# EAGLE board Backplane (EAGLE 5.06)

Size 227.7 x 113.8 mm. Coordinates in mm from the lower left corner, seen from the top.
Outline: 0,0 113.8,113.8 227.7,0 0,0
Copper layers (1*16): Top 0.035mm / dielectric 1.5mm / Bottom 0.035mm
Design rules "default": minimum track width 10mil, minimum drill 24mil, track to track 8mil, track to pad 8mil, pad to pad 8mil, via to via 8mil, smd to smd 8mil, copper to edge 40mil, drill to drill 8mil, minimum pad ring 10mil, minimum via ring 8mil, stop-mask expansion 4mil, vias tented up to drill 0mil, thermal gap 10mil

## Footprints (pad centres in the part's own frame; a part is rotated, then mirrored left to right if it is on the bottom)
50PIN-IDC = drill 0.9 pad 1.27 round: 1 -22.73,-1; 2 -22.73,1; 3 -20.73,-1; 4 -20.73,1; 5 -18.73,-1; 6 -18.73,1; 7 -16.73,-1; 8 -16.73,1; 9 -14.73,-1; 10 -14.73,1; 11 -12.73,-1; 12 -12.73,1; 13 -10.73,-1; 14 -10.73,1; 15 -8.73,-1; 16 -8.73,1; 17 -6.73,-1; 18 -6.73,1; 19 -4.73,-1; 20 -4.73,1; 21 -2.73,-1; 22 -2.73,1; 23 -0.73,-1; 24 -0.73,1; 25 1.27,-1; 26 1.27,1; 27 3.27,-1; 28 3.27,1; 29 5.27,-1; 30 5.27,1; 31 7.27,-1; 32 7.27,1; 33 9.27,-1; 34 9.27,1; 35 11.27,-1; 36 11.27,1; 37 13.27,-1; 38 13.27,1; 39 15.27,-1; 40 15.27,1; 41 17.27,-1; 42 17.27,1; 43 19.27,-1; 44 19.27,1; 45 21.27,-1; 46 21.27,1; 47 23.27,-1; 48 23.27,1; 49 25.27,-1; 50 25.27,1
LED5MM = drill 0.813 octagon: A -1.27,0; K 1.27,0
5566-20 = drill 1.4 square: 1 18.9,-2.75; 2 14.7,-2.75; 3 10.5,-2.75; 4 6.3,-2.75; 5 2.1,-2.75; 6 -2.1,-2.75; 7 -6.3,-2.75; 8 -10.5,-2.75; 9 -14.7,-2.75; 10 -18.9,-2.75; 11 18.9,2.75; 12 14.7,2.75; 13 10.5,2.75; 14 6.3,2.75; 15 2.1,2.75; 16 -2.1,2.75; 17 -6.3,2.75; 18 -10.5,2.75; 19 -14.7,2.75; 20 -18.9,2.75 | hole 3: 23.6,2.29; -23.6,2.29
0204/7 = drill 0.813 octagon: 1 -3.81,0; 2 3.81,0
TACTILE-PTH = drill 1.016 pad 1.88 round: 1 -3.251,2.261; 2 3.251,2.261; 3 -3.251,-2.261; 4 3.251,-2.261
CONN_50PIN = drill 1.2 pad 1.778 square: A1 -31.75,2.54; A2 -29.21,2.54; A3 -26.67,2.54; A4 -24.13,2.54; A5 -21.59,2.54; A6 -19.05,2.54; A7 -16.51,2.54; A8 -13.97,2.54; A9 -11.43,2.54; A10 -8.89,2.54; A11 -6.35,2.54; A12 -3.81,2.54; A13 -1.27,2.54; A14 1.27,2.54; A15 3.81,2.54; A16 6.35,2.54; A17 8.89,2.54; A18 11.43,2.54; A19 13.97,2.54; A20 16.51,2.54; A21 19.05,2.54; A22 21.59,2.54; A23 24.13,2.54; A24 26.67,2.54; A25 29.21,2.54; B1 -31.75,-2.54; B2 -29.21,-2.54; B3 -26.67,-2.54; B4 -24.13,-2.54; B5 -21.59,-2.54; B6 -19.05,-2.54; B7 -16.51,-2.54; B8 -13.97,-2.54; B9 -11.43,-2.54; B10 -8.89,-2.54; B11 -6.35,-2.54; B12 -3.81,-2.54; B13 -1.27,-2.54; B14 1.27,-2.54; B15 3.81,-2.54; B16 6.35,-2.54; B17 8.89,-2.54; B18 11.43,-2.54; B19 13.97,-2.54; B20 16.51,-2.54; B21 19.05,-2.54; B22 21.59,-2.54; B23 24.13,-2.54; B24 26.67,-2.54; B25 29.21,-2.54

## Placement (x,y rotation side)
EXPANSION  IDC_50PIN  [50PIN-IDC]  113.95,14.09 0 top
EXPANSION1  IDC_50PIN  [50PIN-IDC]  112.88,7.01 0 top
LED1  [LED5MM]  118.31,94.44 0 top
PWR_IN  5566-20  [5566-20]  110.19,57.41 90 top
R1  [0204/7]  113.17,88.43 180 top
S1  SWITCH-MOMENTARY-2PTH  [TACTILE-PTH]  98.62,75.06 180 top
U$1  CONN_50PIN  [CONN_50PIN]  56.9,56.9 45 top
U$2  CONN_50PIN  [CONN_50PIN]  174.7,54.82 0 top

## Library data of the parts
EXPANSION EXPANSION1 U$1 U$2 = ARVP
LED1 = led
PWR_IN = con-molex; OC_FARNELL: unknown; OC_NEWARK: unknown
R1 = resistor
S1 = SparkFun

## Nets
3.3V: PWR_IN.1 PWR_IN.2 PWR_IN.11
3V3: EXPANSION1.1 EXPANSION.1 U$1.A1 U$2.A1
5V: EXPANSION1.2 EXPANSION.2 PWR_IN.4 PWR_IN.6 PWR_IN.19 PWR_IN.20 U$1.B1 U$2.B1
12V: EXPANSION1.49 PWR_IN.10 U$1.A25 U$2.A25
GND: EXPANSION1.50 LED1.K PWR_IN.3 PWR_IN.5 PWR_IN.7 PWR_IN.13 PWR_IN.15 PWR_IN.16 PWR_IN.17 S1.1 U$1.A14 U$1.B14 U$1.B25 U$2.A14 U$2.B14 U$2.B25
N$1: LED1.A R1.1
N$10: PWR_IN.14 S1.3
N$11: PWR_IN.8 R1.2

## Tracks (layer width: path | path; a pad name or v marks a point on that pad's centre or on a via)
3.3V  (2 unrouted)
3V3  (3 unrouted)
5V  (7 unrouted)
12V  (3 unrouted)
GND  (15 unrouted)
N$1  (1 unrouted)
N$10  (1 unrouted)
N$11  (1 unrouted)

## Text on the board
_tsilk: 1 | 20